# Altium PCB spine.PcbDoc
Units mil, origin at the board's own origin, x right, y up, seen from the top; angles counter-clockwise.
Board outline 2204.72 x 2683.46 mil, 2 copper layers (Top, Bottom); 70 components, 74 nets, 404 pads, 89 vias.
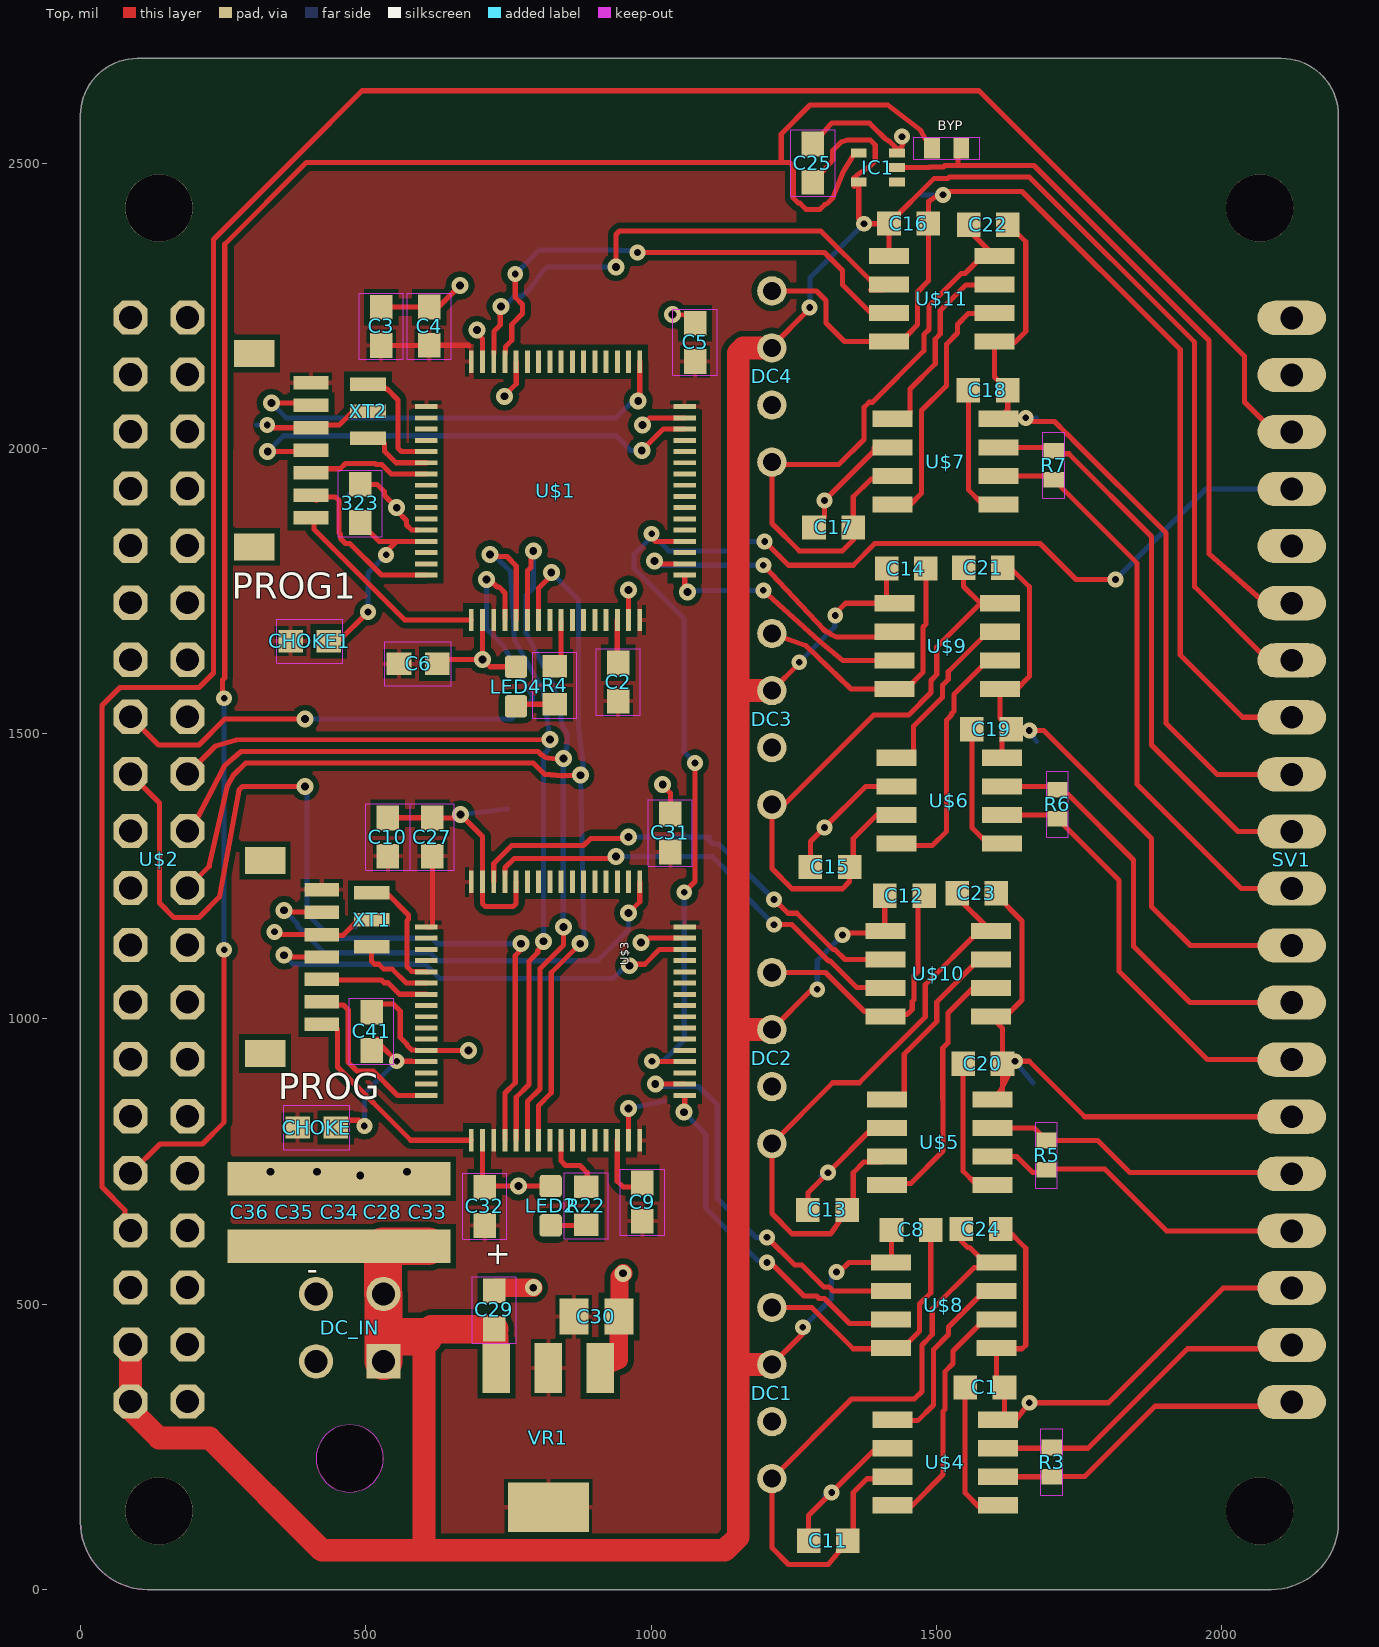
[diagram p0: Top view]
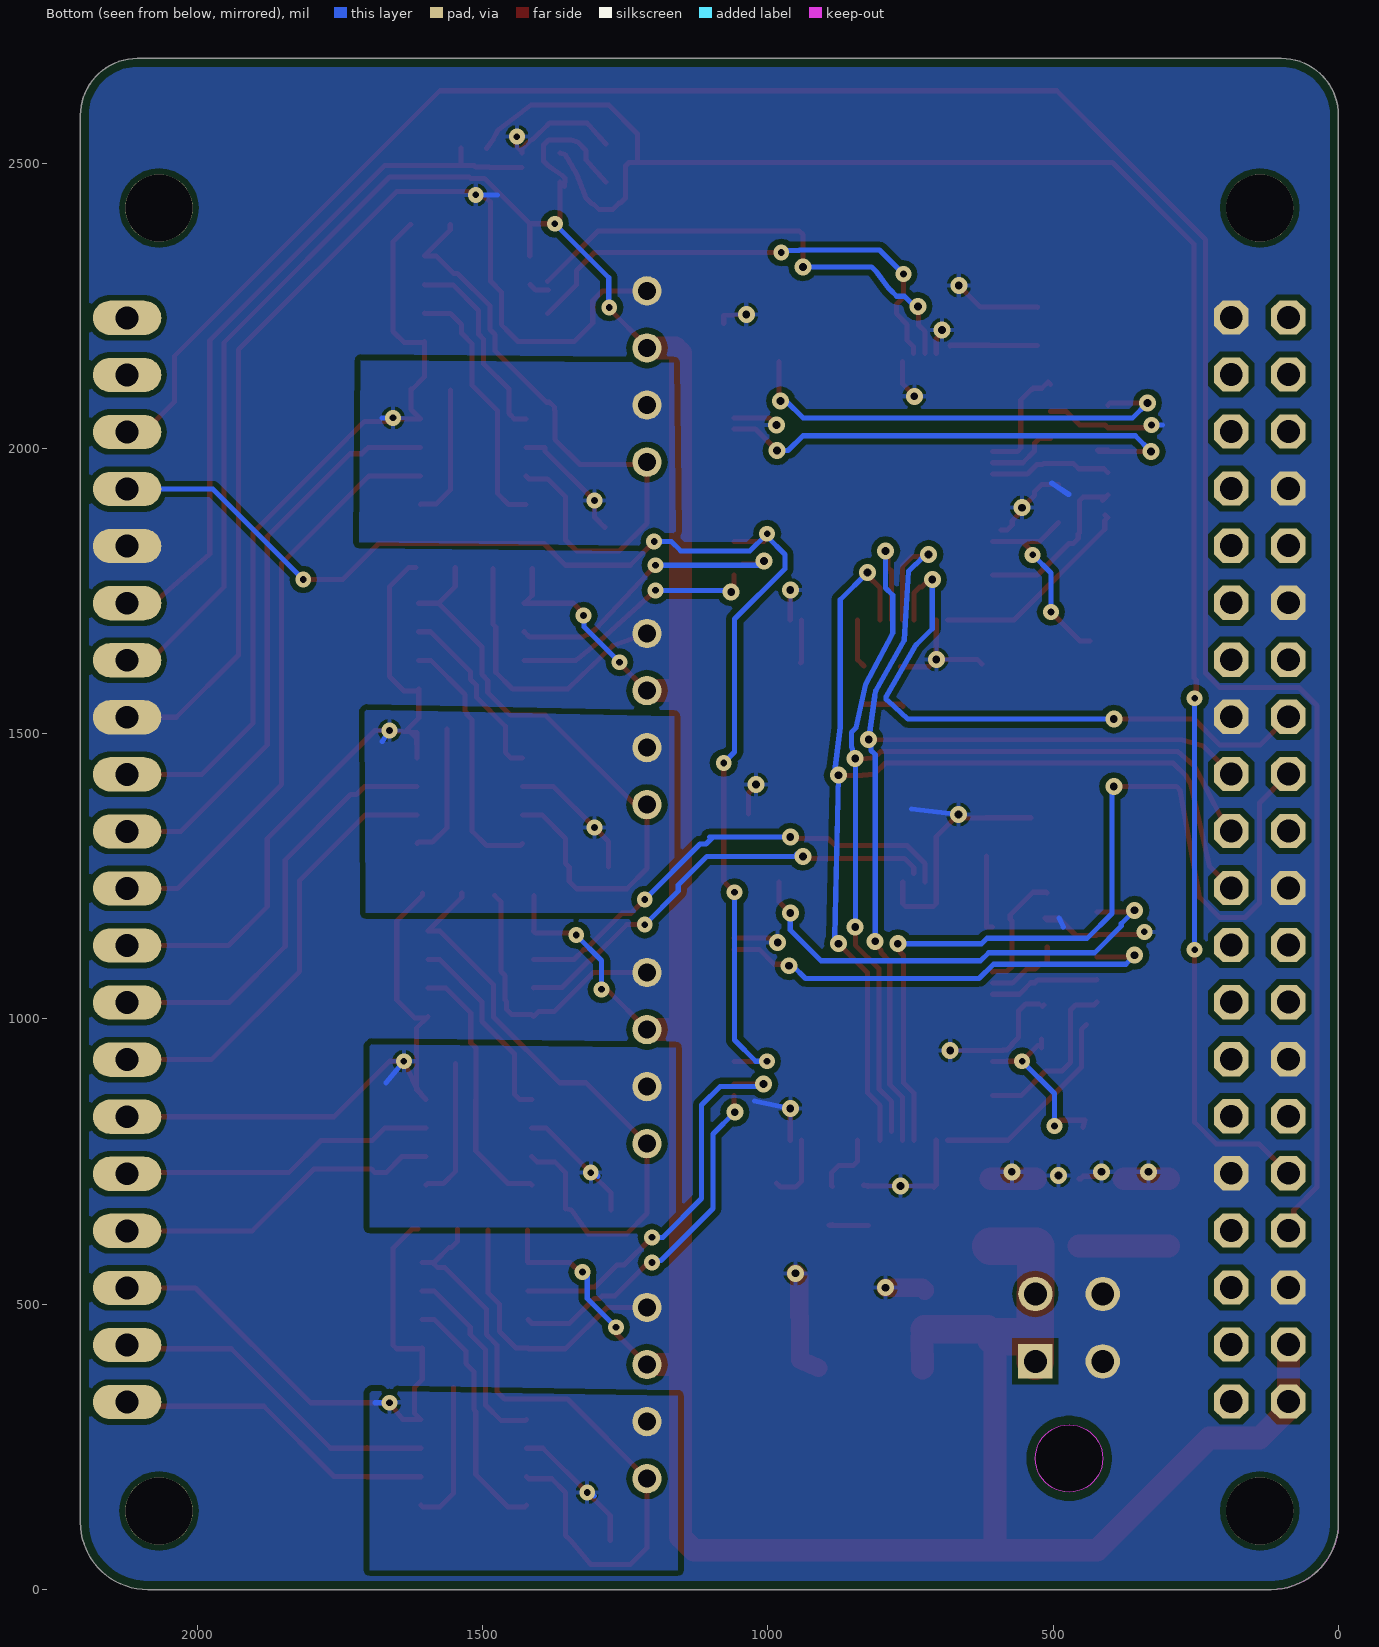
[diagram p1: Bottom view, seen from below]

## Layer stack, top to bottom
Top Solder: solder mask 0.4, Solder Resist, Dk 3.5
Top: signal copper 1.378
Dielectric 1: dielectric 12.6, FR-4, Dk 4.8
Bottom: signal copper 1.378
Bottom Solder: solder mask 0.4, Solder Resist, Dk 3.5

## Board outline
2204.72,2583.46 ccw(c2104.72,2583.46) 2104.72,2683.46 2085.04,2683.46 100,2683.46 ccw(c100,2583.46) 0,2583.46 0,118.11 ccw(c118.11,118.11) 118.11,0 2086.61,0 ccw(c2086.61,118.11) 2204.72,118.11
cut-out: 472.05,170.87 ccw(c472.05,229.92) 531.11,229.92 ccw(c472.05,229.92) 472.05,288.98 ccw(c472.05,229.92) 413,229.92 ccw(c472.05,229.92)

## Design rules (kind name [scope] priority, off if disabled: settings)
BoardOutlineClearance [All] p1: gap=15 ignorepadtopadclearanceinfootprint=FALSE
Clearance SameNet_Pad_Track_Connection [IsPad vs IsTrack] p1: gap=0 ignorepadtopadclearanceinfootprint=FALSE
Clearance Polygon_Clearance [InPolygon] p2: gap=10 ignorepadtopadclearanceinfootprint=FALSE
Clearance [All] p3: gap=10 ignorepadtopadclearanceinfootprint=FALSE
ComponentClearance [All] p1: gap=1 collisioncheckmode=3 verticalgap=1 showdistances=FALSE
DiffPairsRouting [All] p1: maxlimit=393.7 minlimit=6 mostfreqgap=8 toplayer_minwidth=6 toplayer_maxwidth=15 toplayer_prefwidth=8 bottomlayer_minwidth=6 bottomlayer_maxwidth=15 bottomlayer_prefwidth=8 maxuncoupledlength=500
HoleSize [All] p1: absolutevalues=TRUE maxlimit=265 minlimit=10 maxpercent=80.000 minpercent=20.000
HoleToHoleClearance [All] p1: gap=10 allowstackedmicrovias=FALSE
MinimumAnnularRing [All] p1: minimumring=5
MinimumSolderMaskSliver [All] p1: minsoldermaskwidth=0
PlaneClearance [All] p1: clearance=10
PlaneConnect [All] p1: planeconnectstyle=Direct reliefexpansion=16 reliefentries=4 reliefconductorwidth=6 reliefairgap=6
PolygonConnect [All] p1: connectstyle=Relief reliefconductorwidth=8 reliefentries=4 polygonreliefangle="90 Angle" airgapwidth=6
RoutingCorners [All] p1: cornerstyle=45-Degree minsetback=49.21 maxsetback=49.21
RoutingVias [All] p1: holewidth=15 width=30 viastyle="Through Hole" minholewidth=13 minwidth=27 maxholewidth=100 maxwidth=114
ShortCircuit [All] p1 off: allowed=FALSE
SilkToSilkClearance [All] p1: silktosilkclearance=0
SilkToSolderMaskClearance [IsPad] p1: minsilkscreentomaskgap=6 clearancetoexposedcopper=TRUE
SolderMaskExpansion [All] p1: expansion=2.95 istentingtop=FALSE
Width [All] p1: maxlimit=400 minlimit=9 preferedwidth=10 minimp=50.000000 maximp=50.000000 favimp=50.000000
19 further rules are at their usual default settings.

## Classes and differential pairs
polygon class PolygonThermal_ON_Width98400_Gap100000: Polygon_1_Net_3V3
polygon class PolygonThermal_ON_Width100000_Gap100000: Polygon_1_Net_CAN1_GND Polygon_1_Net_CAN2_GND Polygon_1_Net_CAN3_GND
polygon class PolygonThermal_ON_Width160000_Gap100000: Polygon_1_Net_CAN4_GND Polygon_1_Net_GND
polygon class Isolate_9.84: Polygon_1_Net_3V3
polygon class Isolate_10: Polygon_1_Net_CAN1_GND Polygon_1_Net_CAN2_GND Polygon_1_Net_CAN3_GND Polygon_1_Net_CAN4_GND Polygon_1_Net_GND

## Components (designator, comment, footprint, x,y, rotation, side; value= is the part's Value field where it differs from the comment)
323 "1 uF" C0603 490.55,1903.54 r90 top (schematic designator C7)
BYP "" R0402 1518.11,2525.98 r180 top
C1 ".1 uF" C0603K 1585.04,354.33 r0 top
C2 "4.7" C0603 942.52,1590.55 r90 top
C3 "1uF" C0603 527.17,2213.78 r90 top
C4 "100nF" C0603 611.42,2214.17 r90 top
C5 "100nF" C0603 1077.16,2185.82 r90 top
C6 "100nF" C0603 591.73,1622.44 r0 top
C8 ".1 uF" C0603K 1455.91,630.32 r0 top
C9 "4.7" C0603 985.04,679.13 r90 top
C10 "1uF" C0603 538.98,1318.9 r90 top
C11 "1 uF" C0603K 1310.63,85.83 r180 top
C12 ".1 uF" C0603K 1444.09,1216.14 r0 top
C13 "1 uF" C0603K 1309.45,665.35 r180 top
C14 ".1 uF" C0603K 1447.24,1789.37 r0 top
C15 "1 uF" C0603K 1313.78,1266.54 r180 top
C16 ".1 uF" C0603K 1451.57,2394.09 r0 top
C17 "1 uF" C0603K 1320.08,1861.42 r180 top
C18 ".1 uF" C0603K 1590.55,2101.97 r0 top
C19 ".1 uF" C0603K 1596.85,1507.87 r0 top
C20 ".1 uF" C0603K 1581.5,921.65 r0 top
C21 ".1 uF" C0603K 1582.28,1790.94 r0 top
C22 ".1 uF" C0603K 1590.94,2392.13 r0 top
C23 ".1 uF" C0603K 1570.87,1220.47 r0 top
C24 ".1 uF" C0603K 1578.35,631.89 r0 top
C25 "100nF" C0603 1283.86,2500 r90 top
C27 "100nF" C0603 616.93,1318.9 r90 top
C28 "47 uF" C1206K 530.32,661.02 r90 top
C29 "100nF" C0603 725.2,490.16 r90 top
C30 "10uF" C0805K 904.33,478.35 r0 top
C31 "100nF" C0603 1033.86,1325.98 r90 top
C32 "100nF" C0603 708.66,671.65 r90 top
C33 "47 uF" C1206K 609.06,661.02 r90 top
C34 "47 uF" C1206K 454.72,661.02 r90 top
C35 "47 uF" C1206K 375.98,661.02 r90 top
C36 "47 uF" C1206K 297.24,661.02 r90 top
C41 "1 uF" C0603 510.24,978.34 r90 top
CHOKE "600r" 0603 414.17,809.84 r0 top
CHOKE1 "600r" 0603 401.97,1662.2 r0 top
DC1 "VA-1224S" 4SIL 1211.81,344.49 r270 top
DC2 "VA-1224S" 4SIL 1211.81,931.5 r270 top
DC3 "VA-1224S" 4SIL 1211.81,1525.59 r270 top
DC4 "VA-1224S" 4SIL 1211.81,2125.98 r270 top
DC_IN "" 43045-0400 472.05,229.92 r0 top
IC1 "74AHC1G14DCK" SC70-5 1397.64,2492.13 r90 top
LED2 "G" LED-0603 824.02,672.83 r0 top
LED4 "G" LED-0603 763.39,1582.68 r0 top
PROG "22" BM07B-SRSS-TB 359.06,1108.66 r90 top
PROG1 "BM07B-SRSS-TB" BM07B-SRSS-TB 340.16,1996.85 r90 top
R3 "" R0402 1702.36,223.62 r90 top
R4 "70" R0603 831.5,1585.04 r90 top
R5 "" R0402 1693.31,761.42 r90 top
R6 "" R0402 1712.2,1376.38 r90 top
R7 "" R0402 1705.91,1970.47 r90 top
R22 "70" R0603 886.61,672.83 r90 top
SV1 "" MA20-1L 2122.83,1278.74 r90 top
U$1 "STM32F446RET6" TQFP64 832.68,1925.59 r270 top
U$2 "" UP_BOARD 2204.72,0 r90 top
U$3 "STM32F446RET6" TQFP64 832.68,1013.78 r270 top
U$4 "MCP2561" SO08 1515.35,222.83 r270 top
U$5 "MCP2561" SO08 1506.3,783.86 r270 top
U$6 "MCP2561" SO08 1522.44,1382.68 r270 top
U$7 "MCP2561" SO08 1516.14,1976.77 r270 top
U$8 "SI8410" SO08 1512.99,498.43 r270 top
U$9 "SI8410" SO08 1519.29,1653.54 r270 top
U$10 "SI8410" SO08 1503.15,1079.13 r270 top
U$11 "SI8410" SO08 1509.45,2262.2 r270 top
VR1 "LM1117" SOT-223 820.08,266.54 r180 top
XT1 "CSTCE" CSTCE 510.63,1173.62 r270 top
XT2 "CSTCE" CSTCE 504.33,2064.96 r270 top

## Footprints (in the part's own frame and the unit in brackets; to place one, negate y for a bottom-side part, rotate by r counter-clockwise, add the part's x,y. Pads: shape width x height; smd on the part's side, far side on the other; paste and mask are expansions set on the pad)
4SIL [mil] "4SIL"
  round 51.5 hole 31.5: 1(-150,0) 2(-50,0) 3(50,0) 4(150,0)
  body extent -176,-26 176,26, height 50
0603 [mm] "0603"
  rect 1.1x1 smd: 1(-0.85,0) 2(0.85,0)
  Top keep-out lines w0.051: -1.473,-0.983 -1.473,0.983 1.473,0.983 1.473,-0.983 -1.473,-0.983
  body extent -1.5,-1.01 1.5,1.01, height 3.81
43045-0400 [mil] "43045-0400"
  rect 60.24x60.24 / inner round 55.65 / far side rect 60.24x60.24 hole 40.16: P$1(59.06,170.08)
  round 60.24 hole 40.16: P$2(-59.06,170.08) P$3(59.06,288.19) P$4(-59.06,288.19)
  body extent -89,140 89,319, height 50
BM07B-SRSS-TB [mm] "BM07B-SRSS-TB"
  rect 0.6x1.55 smd: 1(3,-1.625) 2(2,-1.625) 3(1,-1.625) 4(0,-1.625) 5(-1,-1.625) 6(-2,-1.625) 7(-3,-1.625)
  rect 1.2x1.8 smd: FIT@1(4.3,0.9) FIT@2(-4.3,0.9)
  body extent -4.9,-2.4 4.9,1.8, height 3.81
C0603 [mm] "C0603"
  rect 1.1x1 smd: 1(-0.85,0) 2(0.85,0)
  Top keep-out lines w0.051: -1.473,0.983 1.473,0.983 1.473,-0.983 -1.473,-0.983 -1.473,0.983
  body extent -1.5,-1.01 1.5,1.01, height 3.81
C0603K [mm] "C0603K"
  rect 1.05x1.08 smd: 1(-0.875,0) 2(0.875,0)
  body extent -1.4,-0.54 1.4,0.54, height 3.81
C0805K [mm] "C0805K"
  rect 1.3x1.6 smd: 1(-1,0) 2(1,0)
  body extent -1.65,-0.8 1.65,0.8, height 3.81
C1206K [mm] "C1206K"
  rect 1.5x2 smd: 1(-1.5,0) 2(1.5,0)
  body extent -2.25,-1 2.25,1, height 3.81
CSTCE [mil] "CSTCE"
  rect 23.62x62.99 smd: 1(-47.24,0) 2(0,0) 3(47.24,0)
  body extent -59,-31 59,31, height 50
LED-0603 [mm] "LED-0603"
  rrect30% 1x1 smd: A(0,-0.877) C(0,0.877)
  body extent -0.51,-1.39 0.51,1.39, height 1.27
MA20-1L [mil] "MA20-1L"
  oval 60x120 hole 40: 1(950,0) 2(850,0) 3(750,0) 4(650,0) 5(550,0) 6(450,0) 7(350,0) 8(250,0) 9(150,0) 10(50,0) 11(-50,0) 12(-150,0) 13(-250,0) 14(-350,0) 15(-450,0) 16(-550,0) 17(-650,0) 18(-750,0) 19(-850,0) 20(-950,0)
  body extent -980,-60 980,60, height 150
R0402 [mm] "R0402"
  rect 0.7x0.9 smd: 1(-0.65,0) 2(0.65,0)
  Top keep-out lines w0.051: 1.473,0.483 -1.473,0.483 -1.473,-0.483 1.473,-0.483 1.473,0.483
  body extent -1.5,-0.51 1.5,0.51, height 3.81
R0603 [mm] "R0603"
  rect 1x1.1 smd: 1(-0.85,0) 2(0.85,0)
  Top keep-out lines w0.051: -1.473,0.983 1.473,0.983 1.473,-0.983 -1.473,-0.983 -1.473,0.983
  body extent -1.5,-1.01 1.5,1.01, height 3.81
SC70-5 [mm] "SC70-5"
  rect 0.4x0.7 smd: 1(-0.65,-0.85) 2(0,-0.85) 3(0.65,-0.85) 4(0.65,0.85) 5(-0.65,0.85)
  body extent -1.07,-1.2 1.07,1.2, height 3.81
SO08 [mm] "SO08"
  rect 0.72x1.78 smd: 1(-1.905,-2.35) 2(-0.635,-2.35) 3(0.635,-2.35) 4(1.905,-2.35) 5(1.905,2.35) 6(0.635,2.35) 7(-0.635,2.35) 8(-1.905,2.35)
  body extent -2.51,-3.24 2.51,3.24, height 3.81
SOT-223 [mil] "SOT-223"
  rect 47.99x87.99 smd: 1(-90.98,-122.01) 2(0,-122.01) 3(90.98,-122.01)
  rect 141.73x86.61 smd: 4(0,122.01)
  body extent -115,-166 115,165, height 150
TQFP64 [mm] "TQFP64"
  rect 0.22x1 smd: 1(-3.75,-5.75) 2(-3.25,-5.75) 3(-2.75,-5.75) 4(-2.25,-5.75) 5(-1.75,-5.75) 6(-1.25,-5.75) 7(-0.75,-5.75) 8(-0.25,-5.75) 9(0.25,-5.75) 10(0.75,-5.75) 11(1.25,-5.75) 12(1.75,-5.75) 13(2.25,-5.75) 14(2.75,-5.75) 15(3.25,-5.75) 16(3.75,-5.75) 33(3.75,5.75) 34(3.25,5.75) 35(2.75,5.75) 36(2.25,5.75) 37(1.75,5.75) 38(1.25,5.75) 39(0.75,5.75) 40(0.25,5.75) 41(-0.25,5.75) 42(-0.75,5.75) 43(-1.25,5.75) 44(-1.75,5.75) 45(-2.25,5.75) 46(-2.75,5.75) 47(-3.25,5.75) 48(-3.75,5.75)
  rect 1x0.22 smd: 17(5.75,-3.75) 18(5.75,-3.25) 19(5.75,-2.75) 20(5.75,-2.25) 21(5.75,-1.75) 22(5.75,-1.25) 23(5.75,-0.75) 24(5.75,-0.25) 25(5.75,0.25) 26(5.75,0.75) 27(5.75,1.25) 28(5.75,1.75) 29(5.75,2.25) 30(5.75,2.75) 31(5.75,3.25) 32(5.75,3.75) 49(-5.75,3.75) 50(-5.75,3.25) 51(-5.75,2.75) 52(-5.75,2.25) 53(-5.75,1.75) 54(-5.75,1.25) 55(-5.75,0.75) 56(-5.75,0.25) 57(-5.75,-0.25) 58(-5.75,-0.75) 59(-5.75,-1.25) 60(-5.75,-1.75) 61(-5.75,-2.25) 62(-5.75,-2.75) 63(-5.75,-3.25) 64(-5.75,-3.75)
  body extent -6.25,-6.25 6.25,6.25, height 3.81
UP_BOARD [mil] "UP_BOARD"
  oct 60x60 / inner round 55.43 / far side oct 60x60 hole 40: 1(329.53,2016.93) 2(329.53,2116.93) 3(429.53,2016.93) 4(429.53,2116.93) 5(529.53,2016.93) 6(529.53,2116.93) 7(629.53,2016.93) 8(629.53,2116.93) 9(729.53,2016.93) 10(729.53,2116.93) 11(829.53,2016.93) 12(829.53,2116.93) 13(929.53,2016.93) 14(929.53,2116.93) 15(1029.53,2016.93) 16(1029.53,2116.93) 17(1129.53,2016.93) 18(1129.53,2116.93) 19(1229.53,2016.93) 20(1229.53,2116.93) 21(1329.53,2016.93) 22(1329.53,2116.93) 23(1429.53,2016.93) 24(1429.53,2116.93) 25(1529.53,2016.93) 26(1529.53,2116.93) 27(1629.53,2016.93) 28(1629.53,2116.93) 29(1729.53,2016.93) 30(1729.53,2116.93) 31(1829.53,2016.93) 32(1829.53,2116.93) 33(1929.53,2016.93) 34(1929.53,2116.93) 35(2029.53,2016.93) 36(2029.53,2116.93) 37(2129.53,2016.93) 38(2129.53,2116.93) 39(2229.53,2016.93) 40(2229.53,2116.93)
  body extent 302,1989 2257,2145, height 150

## Part data
323 C2 C3 C4 C5 C6 C9 C10 C25 C27 C29 C31 C32 C41: library part C0603, PackageName=C0603
BYP R3 R5 R6 R7: library part R0402, PackageName=R0402
C1 C8 C11 C12 C13 C14 C15 C16 C17 C18 C19 C20 C21 C22 C23 C24: library part C0603K, PackageName=C0603K
C28 C33 C34 C35 C36: library part C1206K, PackageName=C1206K
C30: library part C0805K, PackageName=C0805K
CHOKE CHOKE1: library part 0603, PackageName=0603
DC1 DC2 DC3 DC4: library part 4SIL, PackageName=4SIL
DC_IN: library part 43045-0400, PackageName=43045-0400
IC1: library part SC70-5, PackageName=SC70-5
LED2 LED4: library part LED-0603, PackageName=LED-0603
PROG: library part BM07B-SRSS-TB, PackageName=BM07B-SRSS-TB
R4 R22: library part R0603, PackageName=R0603
SV1: library part MA20-1L, PackageName=MA20-1L
U$1 U$3: library part TQFP64, PackageName=TQFP64
U$2: library part UP_BOARD, PackageName=UP_BOARD
U$4 U$5 U$6 U$7 U$8 U$9 U$10 U$11: library part SO08, PackageName=SO08
VR1: library part SOT-223, PackageName=SOT-223
PROG1: PackageName=BM07B-SRSS-TB
XT1 XT2: PackageName=CSTCE

## Free pads (board coordinates)
  round 118.11 hole 118.11 unplated: MH1(137.79,137.8) MH1(472.05,229.92) MH2(137.79,2421.26) MH3(2066.92,2421.26) MH4(2066.92,137.8)

## Via types
v1: diameter 29.78/29.78 (per signal layer), hole 13.78, Top to Bottom, tented both sides, 49 vias
v2: diameter 27.81/27.81 (per signal layer), hole 11.81, Top to Bottom, tented both sides, 40 vias

## Nets (pads, with @x,y where several pads share a name; then routed paths per layer and width w, separated by ;. In a path a pad name is that pad's centre, name@x,y a point inside that pad or via, vN(x,y) a via of type N, cw(c..) or ccw(c..) an arc to the next point about the centre after c; other vN are vias at no path point)
3V3: C2.1 C3.1 C4.1 C5.1 C6.1 C9.1 C10.1 C27.1 C30.1 C31.1 C32.1 CHOKE1.1 CHOKE.1 PROG1.1 PROG.1 U$1.1 U$1.19 U$1.32 U$1.48 U$1.64 U$3.1 U$3.19 U$3.32 U$3.48 U$3.64 VR1.2 VR1.4 | length 356.5
  Top w9: C3.1 680.32,2180.32 ; U$3.1 616.6,1161.42 616.93,1161.75 C27.1
  Top w9.84: C4.1 680.32,2180.32
': C17.1 C22.1 DC4.4 U$7.3 U$11.8 | length 1128.9
  Top w9: U$7.3 1418.31,1946.46 1385.83,1946.46 1354.53,1915.16 C17.1 1354.33,1861.22 1354.33,1839.37 1335.43,1820.47 1259.84,1820.47 1211.81,1868.5 1211.81,1971.65 DC4.4 1216.14,1971.65 1329.13,1971.65 1373.23,2015.75 1373.23,2066.14 1373.58,2066.49 1373.58,2072.16 1382.37,2080.95 1388.03,2080.95 1478.11,2171.02 1478.11,2199.67 1486.97,2208.53 1486.97,2249.93 1543.65,2306.61 1550.52,2306.61 1581.11,2337.2 U$11.8 1556.5,2382.68 C22.1
CAN1_GND: C1.2 C11.2 C24.2 DC1.3 SV1.18 U$4.2 U$4.8 U$8.5 | length 1309.9
  Top w9: C11.2 1276.18,129.72 v2(1316.54,170.08) 1394.29,247.83 U$4.2 ; C24.2 1623.23,631.89 1656.69,598.43 1656.69,428.35 1650.39,422.05 1606.89,422.05 U$8.5 1605.51,368.31 C1.2 1619.49,309.45 U$4.8 1639.57,297.83 v2(1662.99,327.56) 1801.57,327.56 2002.75,528.74 SV1.18
  Bottom w9: 1303.94,163.78 v2(1316.54,170.08) ; v2(1662.99,327.56) 1688.19,327.56
CAN1_H: R3.2 SV1.19 U$4.7 | length 685.8
  Top w9: R3.2 1702.36,247.83 U$4.7 1765.94,247.83 1940.16,422.05 2116.14,422.05 SV1.19
CAN1_L: R3.1 SV1.20 U$4.6 | length 569.3
  Top w9: U$4.6 1702.36,197.83 R3.1 1760.23,198.03 1883.46,321.26 2115.35,321.26 SV1.20
CAN1_RX: U$3.33 U$8.3 | length 625.7
  Top w9: v1(1057.87,836.61) 1059.06,837.8 U$3.33 ; v2(1203.15,573.23) 1209.45,573.23 1268.19,514.49 1290.17,514.49 1294.42,510.24 1303.94,510.24 1348.03,466.14 1413.19,466.14 U$8.3
  Bottom w9: v1(1057.87,836.61) 1096.06,798.42 1096.06,667.71 1187.14,576.64 1199.74,576.64 v2(1203.15,573.23)
CAN1_TX: U$3.34 U$8.2 | length 710.6
  Top w9: v1(1007.48,885.83) U$3.34 ; v2(1203.15,617.32) 1251.8,568.67 1264.27,568.67 1302.7,530.24 1312.22,530.24 1319.03,523.43 U$8.2
  Bottom w9: v1(1007.48,885.83) 1011.42,881.89 1083.46,881.89 1116.06,849.29 1116.06,685.51 1184.25,617.32 v2(1203.15,617.32)
CAN2_GND: C13.2 C20.2 C23.2 DC2.3 SV1.15 U$5.2 U$5.8 U$10.5 | length 1319.4
  Top w9: C13.2 1275,695.47 v2(1310.24,730.71) 1388.39,808.86 U$5.2 ; C23.2 1605.32,1216.73 1650.39,1171.65 1650.39,1033.07 1618.9,1001.57 1598.23,1001.57 U$10.5 1615.94,983.86 1615.94,921.65 1615.94,875.98 U$5.8 1614.76,877.76 v2(1637.8,925.98) 1662.99,925.98 1760.24,828.74 SV1.15
  Bottom w9: 1297.64,724.41 1303.94,730.71 v2(1310.24,730.71) ; v2(1637.8,925.98) 1669.29,888.19
CAN2_H: R5.2 SV1.16 U$5.7 | length 557.2
  Top w9: U$5.7 1671.46,808.86 R5.2 1783.07,787.01 1839.37,730.71 2120.87,730.71 SV1.16
CAN2_L: R5.1 SV1.17 U$5.6 | length 583.1
  Top w9: U$5.6 1641.14,758.86 1669.29,730.71 1688.19,730.71 R5.1 1694.49,737.01 1795.27,737.01 1903.54,628.74 SV1.17
CAN2_RX: U$3.61 U$10.3 | length 798.9
  Top w9: U$3.61@744.27,1255.35 744.27,1265.43 760.18,1281.34 934.88,1281.34 v1(938.58,1285.04) ; v2(1215.75,1165.35) 1247.25,1165.35 1311.1,1101.5 1314.18,1101.5 1360.59,1055.09 1409.67,1055.09 U$10.3
  Bottom w9: v1@949.21,1289.37 949.07,1289.23 942.77,1289.23 v1(938.58,1285.04) 1106.69,1285.04 1156.99,1234.74 1156.99,1224.1 v2(1215.75,1165.35)
CAN2_TX: U$3.62 U$10.2 | length 833
  Top w9: U$3.62 724.41,1272.44 755.9,1303.93 881.88,1303.93 894.49,1316.54 958.27,1316.54 v1(960.63,1318.9) ; v2(1215.75,1209.45) 1239.85,1185.35 1255.53,1185.35 1319.38,1121.5 1322.47,1121.5 1339.84,1104.13 U$10.2
  Bottom w9: v1(960.63,1318.9) 1096.06,1318.9 ; 1102.36,1318.9 1096.06,1318.9 ; v2(1215.75,1209.45) 1118.74,1306.45 1108.51,1306.45 1096.06,1318.9
CAN3_GND: C15.2 C19.2 C21.2 DC3.3 SV1.12 U$6.2 U$6.8 U$9.5 | length 1461.2
  Top w9: C15.2 1279.33,1310.83 v2(1303.94,1335.43) 1376.18,1407.68 U$6.2 ; C21.2 1629.53,1790.94 1662.99,1757.48 1662.99,1600 1637.8,1574.8 1615.55,1574.8 U$9.5 1611.81,1527.36 C19.2 1614.96,1491.54 U$6.8 1615.16,1501.77 v2(1662.99,1505.51) 1688.19,1505.51 1877.16,1316.54 1877.16,1196.86 1945.28,1128.74 SV1.12
  Bottom w9: v2@1297.64,1329.13 v2(1303.94,1335.43) ; v2(1662.99,1505.51) 1675.59,1486.61
CAN3_H: R6.2 SV1.13 U$6.7 | length 753.4
  Top w9: U$6.7 1706.5,1407.68 R6.2 1720.98,1393.19 1731.21,1393.19 1845.67,1278.73 1845.67,1127.56 1944.49,1028.74 SV1.13
CAN3_L: R6.1 SV1.14 U$6.6 | length 778.7
  Top w9: U$6.6 1705.32,1357.68 R6.1 1820.47,1242.52 1820.47,1083.47 1975.2,928.74 SV1.14
CAN3_RX: U$1.33 U$9.3 | length 441.7
  Top w9: U$1.33 1059.06,1753.54 v1(1064.17,1748.43) ; v2(1196.85,1751.18) 1294.84,1662.25 1336.23,1628.54 U$9.3
  Bottom w9: v1(1064.17,1748.43) 1066.93,1751.18 v2(1196.85,1751.18)
CAN3_TX: U$1.34 U$9.2 | length 520.2
  Top w9: v1(1006.42,1802.88) 1011.77,1802.88 1017.01,1797.64 U$1.34@1044.38,1797.64 ; v2(1196.85,1795.28) 1303.12,1682.25 ; 1307.6,1678.43 1311.56,1677.35 1315.36,1674.28 1325.4,1669.29 ; 1325.44,1669.29 1417.52,1669.29 U$9.2
  Top w10: 1303.12,1682.25 ccw(c1322.83,1700.78) 1307.6,1678.43
  Bottom w9: v1(1006.42,1802.88) 1008.54,1802.88 1016.14,1795.28 v2(1196.85,1795.28)
CAN4_GND: C17.2 C18.2 C22.2 DC4.3 SV1.9 U$7.2 U$7.8 U$11.5 | length 1626.1
  Top w9: C17.2@1285.04,1862.01 C17.2 1303.94,1879.72 v2(1303.94,1908.66) 1390.75,1995.47 1390.75,2001.77 U$7.2 ; C22.2 1626.77,2392.13 1656.69,2362.2 1656.69,2204.72 1637.8,2185.83 1603.35,2185.83 U$11.5 1601.97,2125 C18.2 1625,2103.74 1625.2,2103.94 1625.2,2068.31 U$7.8 1654.92,2051.77 v2(1656.69,2053.54) 1662.99,2047.24 1707.09,2047.24 1729.49,2024.84 1729.84,2024.84 1738.62,2016.05 1738.62,2015.7 1902.36,1851.97 1902.36,1518.11 1991.73,1428.74 SV1.9
  Bottom w9: v2(1656.69,2053.54) 1675.59,2053.54
CAN4_H: R7.2 SV1.10 U$7.7 | length 1007
  Top w9: U$7.7 1700.2,2001.77 R7.2 1711.42,1990.55 1732.28,1990.55 1877.17,1845.66 1877.17,1480.32 2028.74,1328.74 SV1.10
CAN4_L: R7.1 SV1.11 U$7.6 | length 1040.8
  Top w9: U$7.6 1699.02,1951.77 R7.1 1851.96,1798.83 1851.96,1411.03 2034.25,1228.74 SV1.11
CAN4_RX: U$1.61 U$11.3 | length 858.4
  Top w9: U$1.61@744.77,2166.66 744.77,2178.19 755.9,2189.32 755.9,2217.32 774.8,2236.22 774.8,2252.2 762.2,2264.8 v2(762.2,2305.51) ; v2(976.38,2343.3) 1303.93,2343.3 1335.43,2311.81 1335.43,2286.61 U$11.3@1385.82,2236.22
  Bottom w9: v2(762.2,2305.51) 804.19,2347.5 944.47,2347.5 945.06,2346.9 972.78,2346.9 v2(976.38,2343.3)
CAN4_TX: U$1.62 U$11.2 | length 899.2
  Top w9: U$1.62@724.77,2166.66 724.77,2205.08 735.9,2216.22 735.9,2247.73 v1(736.96,2248.79) ; v1(938.58,2318.11) 938.58,2374.8 944.88,2381.1 1297.64,2381.1 U$11.2@1385.82,2292.91 ; U$11.2@1384.9,2277.53 1407.26,2277.53 U$11.2
  Bottom w9: v1(736.96,2248.79) 742.32,2248.79 760.24,2266.71 774.16,2266.71 786.1,2278.66 ccw(c768.5,2299.21) 790.38,2283.29 808.88,2308.73 809.57,2309.53 810.05,2310.05 818.11,2318.11 v1(938.58,2318.11)
CS1: U$2.24 U$3.20 | length 1664.3
  Top w9: U$2.24 138.58,1378.74 138.58,1203.15 163.78,1177.95 207.87,1177.95 243.13,1213.21 243.82,1213.9 277.86,1401 278.03,1401.62 283.89,1407.48 v1(393.7,1407.48) ; U$3.20 744.09,870.08 762.2,888.19 762.2,1111.47 768.37,1117.64 768.37,1128.02 v1(772.25,1131.89)
  Bottom w9: v1(393.7,1407.48) 396.85,1404.33 396.85,1184.93 440.36,1141.42 615.93,1141.42 625.46,1131.89 v1(772.25,1131.89)
CS2: U$1.20 U$2.26 | length 1085.7
  Top w9: U$2.26 137.01,1480.32 207.88,1480.32 253.15,1525.59 v1(393.7,1525.59) ; v1(711.81,1770.08) 717.16,1770.08 730.3,1756.93 733.87,1756.93 744.09,1746.71 U$1.20
  Bottom w9: v1(393.7,1525.59) 754.61,1525.59 790.08,1557.87 792.63,1560.42 792.63,1564.33 792.63,1565.21 741.44,1653.78 739.85,1655.85 711.81,1683.89 v1(711.81,1770.08)
  Bottom w9.84: U$2.26@87.8,1526.38 U$2.26
ESTOP: SV1.4 U$1.36 U$3.36 | length 2400.3
  Top w9: v2(1001.57,925.98) 1002.36,925.2 U$3.36 ; 1006.69,1837.01 U$1.36 ; v2(1058.27,1222.05) 1077.17,1240.94 v2(1077.17,1448.82) ; v2(1199.21,1837.01) 1240.95,1795.27 1354.33,1795.27 1392.13,1833.07 1681.89,1833.07 1744.88,1770.08 v2(1814.17,1770.08)
  Bottom w9: v2(1001.57,925.98) 1021.25,925.98 1058.27,962.99 v2(1058.27,1222.05) ; v2(1077.17,1448.82) 1058.27,1467.72 1058.27,1700.79 970.08,1788.98 970.08,1814.17 1001.18,1845.28 v2(1001.18,1850.39) 1003.74,1847.84 1031.1,1820.47 1152.75,1820.47 1169.29,1837.01 v2(1199.21,1837.01) ; v2(1814.17,1770.08) 1972.83,1928.74 SV1.4
GND: 323.2 C3.2 C4.2 C5.2 C6.2 C8.2 C10.2 C12.2 C14.2 C16.2 C25.2 C27.2 C28.2 C29.2 C30.2 C31.2 C32.2 C33.2 C34.2 C35.2 C36.2 C41.2 DC1.1 DC2.1 DC3.1 DC4.1 DC_IN.P$2 DC_IN.P$4 IC1.3 LED2.C LED4.C PROG1.3 PROG.3 SV1.5 SV1.8 U$1.12 U$1.18 U$1.31 U$1.47 U$1.60 U$1.63 U$2.6 U$2.9 U$2.14 U$2.20 U$2.25 U$2.30 U$2.34 U$2.39 U$3.12 U$3.18 U$3.31 U$3.47 U$3.60 U$3.63 U$8.4 U$9.4 U$10.4 U$11.4 VR1.1 XT1.2 XT2.2 | length 6648.3
  Top w9: v2(327.56,2040.94) 332.28,2036.22 PROG1.3 408.86,2040.94 453.54,2040.94 477.56,2064.96 XT2.2 ; v1(333.07,732.28) 363.78,732.28 C35.2 ; v2(340.16,1152.76) 344.88,1148.03 PROG.3 424.61,1146.46 459.84,1146.46 487.01,1173.62 XT1.2 514.17,1177.17 XT1.2@489.76,1177.17 ; v1(414.96,732.28) 422.83,724.41 447.24,724.41 451.57,720.08 C34.2 ; 323.2 519.68,1937.01 532.81,1923.88 532.81,1917.58 v1(554.33,1896.06) 554.33,1890.71 571.62,1873.42 571.62,1865.84 580.76,1856.69 U$1.12@591.62,1856.69 ; C41.2@516.53,1024.4 C41.2@518.75,1022.19 ; C41.2@525.05,1026.52 548.28,1026.52 560.63,1014.17 560.63,967.63 572.12,956.14 572.12,954.23 580.61,945.74 587.55,945.74 588.24,945.05 606.13,945.05 U$3.12 v1(680.31,944.88) ; C3.2 527.56,2247.64 C4.2 627.56,2247.64 v1(665.35,2285.43) ; v1(572.44,732.28) 584.65,720.08 C33.2 ; C27.2 660.24,1352.36 v1(666.14,1358.27) 704.72,1319.69 U$3.63 704.9,1239.98 704.9,1202.12 710.17,1196.85 758.34,1196.85 763.61,1202.12 763.61,1239.99 U$3.60 ; C6.2 633.07,1630.32 v1(704.72,1630.32) ; v1(694.95,2207.17) 694.95,2201.82 704.73,2192.04 U$1.63@704.73,2166.66 ; U$3.18 704.72,709.06 C32.2 710.63,707.09 v1(767.72,707.09) 767.99,707.36 LED2.C ; U$1.18 v1(704.72,1630.32) ; v1(743.31,2091.33) 743.31,2092.66 763.78,2113.13 U$1.60 ; LED4.C 717.83,1617.2 v1(704.72,1630.32) ; U$3.31 v1(960.63,842.91) ; U$1.31 v1(960.63,1751.97) ; v1(982.68,1133.86) 989.03,1133.86 996.9,1141.73 U$3.47 ; v1(985.04,2040.94) 997.64,2053.54 U$1.47 ; v1(1020.47,1411.02) 1020.47,1409.42 1033.86,1396.03 C31.2 ; v1(1037.79,2234.64) 1077.16,2233.06 C5.2 ; DC1.1 1281.88,494.49 1354.32,422.05 1419.09,422.05 U$8.4 1441.34,423.43 1469.21,451.31 1469.21,451.74 1470.51,453.04 1470.51,500.44 1490.35,520.28 C8.2 ; DC2.1 1305.9,1081.5 1374.09,1013.3 1401.45,1013.3 U$10.4 1414.37,1007.87 1448.82,1007.87 1457.71,1016.76 1457.71,1030.78 1460.67,1033.74 1460.67,1076.42 1467.71,1083.46 1467.71,1205.31 C12.2 ; DC3.1 1271.81,1654.11 1350.59,1578.54 1354.73,1578.54 1447.63,1578.54 1476.81,1607.71 1476.81,1687.05 1481.69,1691.93 C14.2 ; DC4.1 1289.96,2275.98 1306.89,2259.05 1306.89,2219.65 1339.34,2187.2 1437.8,2187.2 1458.11,2207.51 1458.11,2207.95 1466.97,2216.81 1466.97,2274.15 1486.02,2293.2 C16.2 1486.02,2432.09 1508.96,2448.37 1511.81,2450.39 1650.39,2450.39 1927.56,2173.23 1927.56,1637.81 2036.61,1528.74 SV1.8 ; C25.2 1298.55,2549.89 1313.78,2566.95 1316.91,2570.07 1378.69,2570.07 1382.77,2570.07 1385.68,2567.22 1411.12,2542.34 1417.32,2538.58 1419.17,2536.73 IC1.3@1431.1,2524.8 ; IC1.3 1431.1,2520.87 1433.31,2522.59 1439.17,2528.45 1441.73,2534.17 1441.73,2542.46 v2(1439.82,2546.3) ; v2@1510.93,2449.77 1511.81,2448.89 v2(1511.81,2444.36)
  Top w9.84: C10.2 C27.2 ; LED4.C LED4.C@767.05,1617.2 ; LED2.C LED2.C@831.61,708.66
  Top w32: C29.2 725.2,525.45 728.88,529.13 v1(793.7,529.13) ; VR1.1@911.06,388.54 943.7,402.28 C30.2 944.88,479.53 944.88,548.03 v1(951.18,554.33)
  Top w40: C36.2 C35.2 ; C28.2 C33.2
  Bottom w9: 308.66,2040.94 v2(327.56,2040.94) ; v2@333.86,1159.06 v2(340.16,1152.76) ; 482.28,1161.42 489.76,1177.17 ; v1(666.14,1358.27) 748.03,1368.11 ; v1(960.63,842.91) 1023.62,856.3 ; 1474.02,2444.09 v2(1511.81,2444.36)
  Bottom w9.84: 472.44,1919.29 501.97,1938.98
  other v1: 490.55,725.98
INDICATOR1: R22.2 U$3.25 | length 115.4
  Top w9: U$3.25 842.52,751.18 850.39,743.31 875.59,743.31 888.19,730.71 888.19,707.87 R22.2
INDICATOR2: R4.2 U$1.25 | length 85.3
  Top w9: R4.2 842.52,1629.53 U$1.25
L_5V: C8.1 C12.1 C14.1 C16.1 C25.1 C28.1 C29.1 C33.1 C34.1 C35.1 C36.1 DC1.2 DC2.2 DC3.2 DC4.2 DC_IN.P$1 DC_IN.P$3 IC1.5 SV1.7 U$2.2 U$2.4 U$8.1 U$9.1 U$10.1 U$11.1 VR1.3 | length 7956.5
  Top w9: C28.1 569.68,601.97 C33.1@585.83,585.83 ; DC1.2 1266.14,448.82 v2(1266.14,459.84) ; DC2.2 1282.28,1051.97 v2(1291.34,1051.97) ; DC3.2 1260.63,1624.41 1266.14,1629.92 v2(1259.84,1625.2) ; DC4.2 1211.81,2178.44 1277.98,2244.61 v2(1277.98,2247.07) ; C25.1 1298.55,2482.97 1300.23,2484.86 1318.55,2505.59 1318.55,2522 1333.25,2536.7 1344.19,2540.59 1384.17,2540.59 1392.96,2531.81 1392.96,2503.63 1384.17,2494.84 1383.41,2494.32 1361.26,2479.14 1355.4,2473.28 1355.26,2470.23 1356.3,2458.66 ; v2(1322.83,1707.08) 1322.83,1710.67 1340.7,1728.54 U$9.1 1412.8,1742.52 C14.1 ; v2(1324.96,556.46) 1329.78,556.46 1346.75,573.43 U$8.1 1421.46,574.41 C8.1 ; v2(1335.79,1147.15) 1339.2,1150.56 1407.06,1150.56 U$10.1 1409.65,1155.12 C12.1 ; IC1.5 1364.17,2402.76 v2(1373.23,2393.7) 1416.73,2393.7 C16.1 ; U$11.1 1417.13,2337.4 C16.1 ; SV1.7 2081.5,1628.74 1952.76,1757.48 1952.76,2185.82 1663,2475.59 1523.12,2475.59 1520.8,2473.26 1496.31,2473.26 C16.1
  Top w16: C29.1 734.25,432.2 VR1.3@729.09,388.54
  Top w40: U$2.2@87.8,315.75 137.8,265.75 226.38,265.75 423.23,68.9 601.97,68.9 ; U$2.2 U$2.4 ; C36.1 C35.1 C34.1 ; 601.97,442.91 601.97,68.9 ; VR1.3@729.09,388.54 C29.1@729.84,442.91 ; DC1.2 1161.42,394.49 1152.76,403.15 ; DC2.2 1153.94,981.5 1152.76,982.68 ; DC3.2 1164.57,1575.59 1152.76,1587.4 ; DC4.2 1161.81,2175.98 1152.76,2166.93 1152.76,1587.4 ; 601.97,68.9 1129.33,68.9 1152.76,92.33 1152.76,403.15 ; 1152.76,403.15 1152.76,982.68 ; 1152.76,982.68 1152.76,1587.4
  Top w50: 601.97,442.91 615.75,456.69 C29.1
  Top w66: DC_IN.P$1 531.1,434.65 ; 601.97,442.91 539.37,442.91 531.1,434.65 ; C33.1 C28.1 530.32,518.9 DC_IN.P$3 531.1,434.65
  Bottom w9: v2(1259.84,1625.2) 1322.06,1687.42 1322.06,1706.31 v2(1322.83,1707.08) ; v2(1266.14,459.84) 1316.54,510.24 1316.54,548.36 1324.64,556.46 v2(1324.96,556.46) ; v2(1277.98,2247.07) 1278.74,2247.83 1278.74,2299.21 v2(1373.23,2393.7) ; v2(1291.34,1051.97) 1291.34,1102.36 1335.79,1146.82 v2(1335.79,1147.15)
MC01: U$3.5 XT1.1 | length 210.9
  Top w9: XT1.1 511.81,1222.05 535.43,1222.05 575.19,1182.29 575.19,1174.83 572.12,1171.76 572.12,1092.02 580.61,1083.53 605.45,1083.53 U$3.5@606.13,1082.85
MC02: U$1.5 XT2.1 | length 203.8
  Top w9: XT2.1 508.66,2116.54 519.81,2105.39 534.83,2105.39 536.68,2103.54 538.04,2103.54 556.69,2084.89 556.69,2000.35 562.55,1994.49 U$1.5
MISO: U$1.22 U$2.21 U$3.22 | length 1934.4
  Top w9: U$2.21 204.39,1350.86 240.48,1420.64 252.57,1443.57 254.05,1445.3 281.47,1468.82 801.99,1468.82 803.07,1467.73 806.76,1464.04 815.37,1458.2 819.31,1457.66 846.57,1454.31 846.57,1456.51 v1(846.87,1456.82) ; U$3.22@783.46,802.59 783.46,855.71 805.3,877.55 805.3,1088.08 846.59,1129.37 846.59,1160.99 v1(846.87,1161.27) ; U$1.22 783.46,1781.37 783.78,1781.69 783.78,1785.58 789.91,1791.71 789.91,1816.68 v1(793.7,1820.47)
  Bottom w9: v1(793.7,1820.47) 793.7,1755.14 781.1,1742.54 781.1,1678.74 781.1,1676.26 782.25,1674.07 828.98,1585.43 832.63,1569.83 845.86,1510.05 853.04,1502.31 853.04,1477.55 846.89,1457.15 v1(846.87,1456.82) 846.31,1456.25 846.31,1161.83 v1(846.87,1161.27)
MOSI: U$1.23 U$2.19 U$3.23 | length 1988.8
  Top w9: U$2.19 225.79,1267.52 258.03,1409.91 267.65,1426.71 289.76,1448.82 793.7,1448.82 813.5,1429.02 844.43,1426.34 ccw(c846.8,1454.28) 847.65,1426.25 875.98,1427.17 v1(876.2,1427.17) ; U$3.23 803.15,848.53 825.2,870.58 825.2,1081.11 v1(875.98,1131.89) ; U$1.23 803.15,1755.38 825.2,1777.42 v1(825.2,1782.67)
  Bottom w9: v1(825.2,1782.67) 873.04,1734.83 873.04,1510.59 881.77,1441.24 881.77,1432.96 v1@875.98,1427.17 ; v1(875.98,1131.89) 882.75,1138.66 882.75,1142.92 v1(876.2,1427.17)
N$1: U$1.14
N$2: C41.1 CHOKE.2 U$3.13 | length 313.8
  Top w9: CHOKE.2 444.49,822.44 487.8,822.44 v2(497.64,812.6) ; C41.1@520.47,949.2 C41.1@520.47,964.95 ; C41.1@526.77,953.54 v2(554.33,925.98) 580.32,925.98 U$3.13
  Bottom w9: v2(497.64,812.6) 497.64,869.29 v2(554.33,925.98)
N$3: C9.2 U$3.30 | length 122.9
  Top w9: U$3.30@940.94,787.4 940.94,715.75 951.18,705.51 977.95,705.51 C9.2
N$4: 323.1 CHOKE1.2 U$1.13 | length 363.9
  Top w9: CHOKE1.2 452.76,1662.2 v2(503.94,1713.39) ; 323.1 523.62,1837.01 554.33,1837.01 ; v2(535.89,1813.44) 535.89,1818.26 541.73,1824.11 541.73,1824.41 554.33,1837.01 ; U$1.13 605.98,1836.69 563.33,1836.69 563.01,1837.01 554.33,1837.01
  Bottom w9: v2(503.94,1713.39) 503.94,1781.5 v2(535.89,1813.44)
N$5: C2.2 U$1.30 | length 75.8
  Top w9: U$1.30@940.94,1699.21 940.94,1625.59 C2.2
N$6: C1.1 U$4.5 | length 253.8
  Top w9: C1.1 1550.59,169.09 1574.8,144.88 1604.92,144.88 U$4.5
N$7: LED4.A R4.1 | length 69.5
  Top w9: LED4.A 766.81,1551.57 R4.1
N$8: U$1.6 XT2.3 | length 127.7
  Top w9: XT2.3 524.01,2017.72 532.67,2009.06 532.67,1995.45 553.33,1974.8 U$1.6
N$10: C20.1 U$5.5 | length 250.3
  Top w9: C20.1 1547.05,733.27 1568.5,711.81 1595.87,711.81 U$5.5
N$11: C15.1 C21.1 DC3.4 U$6.3 U$9.8 | length 1109.3
  Top w9: DC3.4 DC3.4@1211.81,1354.33 ; U$6.3 1395.47,1357.68 1354.33,1316.54 1354.33,1272.64 C15.1 1348.03,1266.34 1348.03,1240.94 1335.43,1228.35 1247.24,1228.35 1211.81,1263.78 DC3.4@1211.81,1354.33 ; C21.1 1547.83,1758.07 U$9.8@1577.36,1728.54 ; U$9.8 U$9.8@1577.36,1728.54 ; DC3.4@1211.81,1354.33 1389.96,1532.48 1451.14,1532.48 1490.71,1572.05 1490.71,1593.33 1500.87,1603.49 1500.87,1652.05 U$9.8@1577.36,1728.54
N$12: C11.1 C24.1 DC1.4 U$4.3 U$8.8 | length 1159.2
  Top w9: U$4.3 1419.41,194.41 1378.65,194.41 1354.33,170.09 1354.33,95.08 C11.1 1310.76,44.09 1240.95,44.09 1211.81,73.23 DC1.4 1351.18,333.86 1461.42,333.86 1474.92,347.36 1474.92,428.73 1489.21,443.02 1489.21,443.46 1492.91,447.16 1492.91,491.34 1565.83,564.25 1578.42,564.25 1587.6,573.43 U$8.8 ; C24.1 1543.9,610.43 1554.46,599.87 1558.2,599.87 1584.85,573.23 U$8.8@1587.4,573.23
N$14: U$4.1 U$8.7 | length 342.1
  Top w9: U$4.1 1424.6,296.06 1467.32,296.06 1494.92,323.66 1494.92,420.45 1521.39,446.92 1521.39,460.18 1584.64,523.43 U$8.7
N$15: U$7.1 U$11.7 | length 350.5
  Top w9: U$7.1 1444.48,2051.77 1453.66,2060.95 1453.66,2103.94 1498.11,2148.39 1498.11,2191.38 1506.97,2200.24 1506.97,2241.65 1551.93,2286.61 1601.38,2286.61 U$11.7
N$16: U$4.4 U$8.6 | length 436.6
  Top w9: U$4.4 1425.79,144.88 1455.12,144.88 1511.81,201.57 1511.81,312.26 1514.92,315.38 1514.92,381.8 1529.21,396.09 1529.21,418 1584.64,473.43 U$8.6
N$17: U$7.4 U$11.6 | length 453.8
  Top w9: U$7.4 1454.53,1901.77 1474.02,1921.26 1474.02,2066.14 1518.11,2110.23 1518.11,2183.1 1537.01,2202 1537.01,2217.32 1555.91,2236.22 1600.99,2236.22 U$11.6
N$18: C18.1 U$7.5 | length 237.8
  Top w9: C18.1 1556.1,1927.36 1581.1,1902.36 1608.07,1902.36 U$7.5
N$19: C13.1 C23.1 DC2.4 U$5.3 U$10.8 | length 1098
  Top w9: U$5.3 1404.61,749.68 1373.31,749.68 1354.33,730.71 1354.33,667.52 C13.1 1314.76,623.62 1247.24,623.62 1211.81,659.06 DC2.4 1318.5,888.19 1365.12,888.19 1480.67,1003.74 1480.67,1059.99 1574.81,1154.13 U$10.8 1536.42,1213.39 C23.1
N$20: U$5.1 U$10.7 | length 345.1
  Top w9: U$5.1 1434.64,858.86 1443.82,868.03 1443.82,938.61 1500.67,995.46 1500.67,1029.99 1574.81,1104.13 U$10.7
N$21: U$5.4 U$10.6 | length 461.8
  Top w9: U$5.4 1416.73,711.81 1455.12,711.81 1511.81,768.5 1511.81,858.6 1511.38,859.03 1511.38,949.12 1520.67,958.41 1520.67,1010.43 1564.37,1054.13 U$10.6
N$22: C19.1 U$6.5 | length 236.6
  Top w9: C19.1 1562.4,1335.24 1587.4,1310.24 1612.4,1310.24 U$6.5
N$24: U$3.14
N$26: U$6.1 U$9.7 | length 320.6
  Top w9: U$6.1 1450.79,1457.68 1459.96,1466.86 1459.96,1513.02 1510.71,1563.76 1510.71,1585.04 1520.87,1595.2 1520.87,1608.46 1590.94,1678.54 U$9.7
N$27: U$6.4 U$9.6 | length 450.7
  Top w9: U$6.4 1433.66,1303.94 1492.91,1303.94 1518.11,1329.14 1518.11,1524.1 1526.73,1532.73 1526.73,1535.34 1530.71,1539.32 1530.71,1568.5 1590.75,1628.54 U$9.6
N$28: LED2.A R22.1 | length 73.2
  Top w9: LED2.A R22.1@891.85,638.31
  Top w9.84: R22.1 R22.1@891.85,638.31
N$30: U$3.6 XT1.3 | length 137.2
  Top w9: XT1.3 510.24,1125.99 510.24,1101.33 515.51,1096.06 522.83,1096.06 531.57,1087.33 546.62,1087.33 570.95,1062.99 U$3.6
NRST1: PROG.5 U$3.7 | length 194
  Top w9: PROG.5 424,1068.33 527.52,1068.33 532.3,1063.54 539.13,1063.54 555.67,1047 559.36,1043.31 U$3.7
NRST2: PROG1.5 U$1.7 | length 216.5
  Top w9: PROG1.5 410.94,1964.29 455.29,1964.29 464.65,1973.65 516.45,1973.65 518.45,1971.65 528.19,1971.65 544.72,1955.12 U$1.7
SBUS_IN: BYP.1 IC1.2 SV1.6 | length 1257.1
  Top w9: IC1.2 1486.89,2492.13 1488.02,2493.26 1512.51,2493.26 1514.83,2495.59 1537.8,2495.59 ; BYP.1@1537.8,2525.98 1537.8,2495.59 ; SV1.6 2075.98,1728.74 1977.95,1814.93 1977.95,2188.92 1671.28,2495.59 1537.8,2495.59
SCK: U$1.21 U$2.23 U$3.21 | length 1889.7
  Top w9: U$2.23 235.99,1477.73 236.74,1478.47 273.19,1488.82 v1(823.15,1489.93) ; v1(718.11,1814.17) 721.89,1810.38 747.49,1810.38 763.78,1794.09 U$1.21 ; U$3.21 763.78,862.9 786.3,885.42 786.3,1101.26 801.64,1116.6 801.64,1120.36 811.8,1130.52 v1(811.8,1136.14)
  Bottom w9: v1(718.11,1814.17) 723.46,1814.17 741.39,1796.24 742.09,1796.24 753.51,1784.82 760.94,1663.62 810.8,1575.32 812.63,1567.52 812.66,1565.67 v1(823.15,1489.93) ; v1(811.8,1136.14) 811.8,1463.3 819.17,1470.68 819.17,1486.16 v1@822.92,1489.91
SWO1: U$3.55
SWO2: U$1.55
TCK1: PROG.2 U$3.49 | length 824.7
  Top w9: v1(357.09,1190.55) 360.24,1187.4 PROG.2 ; v1(960.63,1185.83) 980.32,1205.51 U$3.49
  Bottom w9: v1(357.09,1190.55) 380.55,1167.09 380.55,1162.75 427.24,1116.06 613.01,1116.06 627.07,1102 906.72,1102 960.63,1155.91 v1(960.63,1185.83)
TCK2: PROG1.2 U$1.49 | length 807.1
  Top w9: v1(334.65,2079.53) 400.2,2079.53 PROG1.2 ; v1(977.56,2083.07) 980.32,2085.83 U$1.49
  Bottom w9: v1(334.65,2079.53) 360.64,2053.54 938.58,2053.54 968.11,2083.07 v1(977.56,2083.07)
TMS1: PROG.4 U$3.46 | length 807.4
  Top w9: v1(357.09,1111.81) 360.24,1108.66 PROG.4 ; v1(962.6,1093.31) 965.35,1096.06 988.98,1096.06 1014.96,1122.05 U$3.46
  Bottom w9: v1(357.09,1111.81) 372.84,1096.06 604.72,1096.06 629.92,1070.86 933.8,1070.86 956.25,1093.31 v1(962.6,1093.31)
TMS2: PROG1.4 U$1.46 | length 881.1
  Top w9: v1(328.35,1994.49) 419.69,1994.49 422.05,1996.85 PROG1.4 ; v1(983.86,1996.06) 1021.65,2033.86 U$1.46
  Bottom w9: v1(328.35,1994.49) 355.9,2022.04 938.59,2022.04 964.57,1996.06 v1(983.86,1996.06)
USART1_RX: PROG.7 U$3.17 | length 366
  Top w9: PROG.7@441.74,990.55 450.4,981.89 450.4,916 579,787.4 U$3.17
USART1_TX: PROG.6 U$3.16 | length 305
  Top w9: PROG.6 428.61,1024.34 460.87,1024.34 469.4,1015.81 469.4,923.87 484.54,908.73 513.37,908.73 555.95,866.14 U$3.16
USART2_RX: PROG1.7 U$1.17 | length 370.8
  Top w9: PROG1.7@408.86,1883.46 PROG1.7 409.45,1873.43 409.45,1858.27 568.5,1699.21 U$1.17
USART2_TX: PROG1.6 U$1.16 | length 311.2
  Top w9: PROG1.6@413.58,1908.66 PROG1.6 407.28,1914.96 447.24,1914.96 453.54,1908.66 453.54,1851.97 455.87,1849.64 455.87,1842.21 464.65,1833.42 472.08,1833.42 527.56,1777.95 U$1.16
XBEE_RX: SV1.3 U$2.8 | length 4211.7
  Top w9: U$2.8 78.29,639.04 78.29,665.02 37.8,705.51 37.8,1549.6 69.29,1581.1 207.87,1581.1 233.07,1606.3 233.07,2366.14 383.87,2516.94 493.69,2626.77 1574.8,2626.77 2040.05,2161.51 2040.05,2081.52 2092.83,2028.74 SV1.3
XBEE_TX: BYP.2 IC1.4 U$2.10 | length 3403.1
  Top w9: U$2.10 139.37,781.1 214.17,781.1 251.97,818.9 v2(251.97,1121.26) ; v2(251.97,1562.2) 249.22,1564.95 249.22,1594.16 253.07,1598.01 253.07,2357.86 396,2500.79 1228.34,2500.79 ; IC1.4 1355.4,2514.84 1335.4,2481.57 1318.55,2438.67 1309.76,2429.89 1304.35,2427.1 1296.15,2418.89 1271.57,2418.89 1268.64,2421.82 1263.37,2427.1 1260.58,2429.89 1257.96,2429.89 1249.17,2438.67 1249.17,2494.93 1243.32,2500.79 1228.34,2500.79 ; 1472.44,2557.76 1468.88,2560.47 1415.07,2601.57 1411.69,2601.57 1278.74,2601.57 1228.34,2551.18 1228.34,2500.79 ; 1472.94,2556.84 1481.74,2540.7 BYP.2
  Bottom w9: v2(251.97,1121.26) v2(251.97,1562.2)
pads on no net: IC1.1 PROG1.FIT@1 PROG1.FIT@2 PROG.FIT@1 PROG.FIT@2 SV1.1 SV1.2 U$1.2 U$1.3 U$1.4 U$1.8 U$1.9 U$1.10 U$1.11 U$1.15 U$1.24 U$1.26 U$1.27 U$1.28 U$1.29 U$1.35 U$1.37 U$1.38 U$1.39 U$1.40 U$1.41 U$1.42 U$1.43 U$1.44 U$1.45 U$1.50 U$1.51 U$1.52 U$1.53 U$1.54 U$1.56 U$1.57 U$1.58 U$1.59 U$2.1 U$2.3 U$2.5 U$2.7 U$2.11 U$2.12 U$2.13 U$2.15 U$2.16 U$2.17 U$2.18 U$2.22 U$2.27 U$2.28 U$2.29 U$2.31 U$2.32 U$2.33 U$2.35 U$2.36 U$2.37 U$2.38 U$2.40 U$3.2 U$3.3 U$3.4 U$3.8 U$3.9 U$3.10 U$3.11 U$3.15 U$3.24 U$3.26 U$3.27 U$3.28 U$3.29 U$3.35 U$3.37 U$3.38 U$3.39 U$3.40 U$3.41 U$3.42 U$3.43 U$3.44 U$3.45 U$3.50 U$3.51 U$3.52 U$3.53 U$3.54 U$3.56 U$3.57 U$3.58 U$3.59

## Polygon pours and split planes (outlines as drawn)
GND on Bottom "Polygon_1_Net_GND" (solid, remove dead copper, pour order 5): -8,3328.87 2212.72,3328.87 2212.72,-8 -8,-8
CAN3_GND on Bottom "Polygon_1_Net_CAN3_GND" (solid, remove dead copper, pour order 3): 1163.9,1530.49 1706.21,1541.72 1704.18,1185.94 1163.9,1185.94
CAN4_GND on Bottom "Polygon_1_Net_CAN4_GND" (solid, remove dead copper, pour order 2): 1164.53,2150.07 1713.44,2154.52 1716.34,1835.4 1160.81,1828.91
CAN2_GND on Bottom "Polygon_1_Net_CAN2_GND" (solid, remove dead copper, pour order 1): 1161.14,949.82 1697.91,955.85 1697.91,634.76 1161.14,634.76
CAN1_GND on Bottom "Polygon_1_Net_CAN1_GND" (solid, remove dead copper, pour order 0): 1157.6,339.57 1697.91,347.99 1697.91,34.37 1157.6,34.37
3V3 on Top "Polygon_1_Net_3V3" (solid, remove dead copper, pour order 4): 270.69,2514.76 1254.92,2514.76 1254.92,44.29 260.81,44.29

## Keep-outs
Keep-Out Layer:
  lines w0: 0,118.11 ccw(c118.11,118.11) 118.11,0

## Silkscreen, mask and mechanical layers (free items; w line width, h text height)
Top Overlay:
  text "+" at 748.8,563.79 h40.15 r90
  text "-" at 396.85,541.73 h40.15
Unrouted:
  lines w0: 454.72,601.97 530.32,601.97 ; 1001.18,1845.28 1006.69,1837.01 ; 1001.97,925.2 1020.47,925.2 ; 1356.3,2458.66 1364.17,2466.54 ; 1379.53,2236.22 1416.93,2237.2

## Text inside footprints (layer, text, board x,y; h text height)
SV1: tPlace "10" at 2237.83,1293.74 h77.5 r90; tPlace "20" at 2237.83,288.74 h77.5 r90; tPlace "1" at 2237.83,2213.74 h77.5 r90